# Altium PCB кошколаз.PcbDoc
Units mm, origin at the board's own origin, x right, y up, seen from the top; angles counter-clockwise.
Board outline 45 x 65 mm, 2 copper layers (Top Layer, Bottom Layer); 42 components, 44 nets, 170 pads, 24 vias.
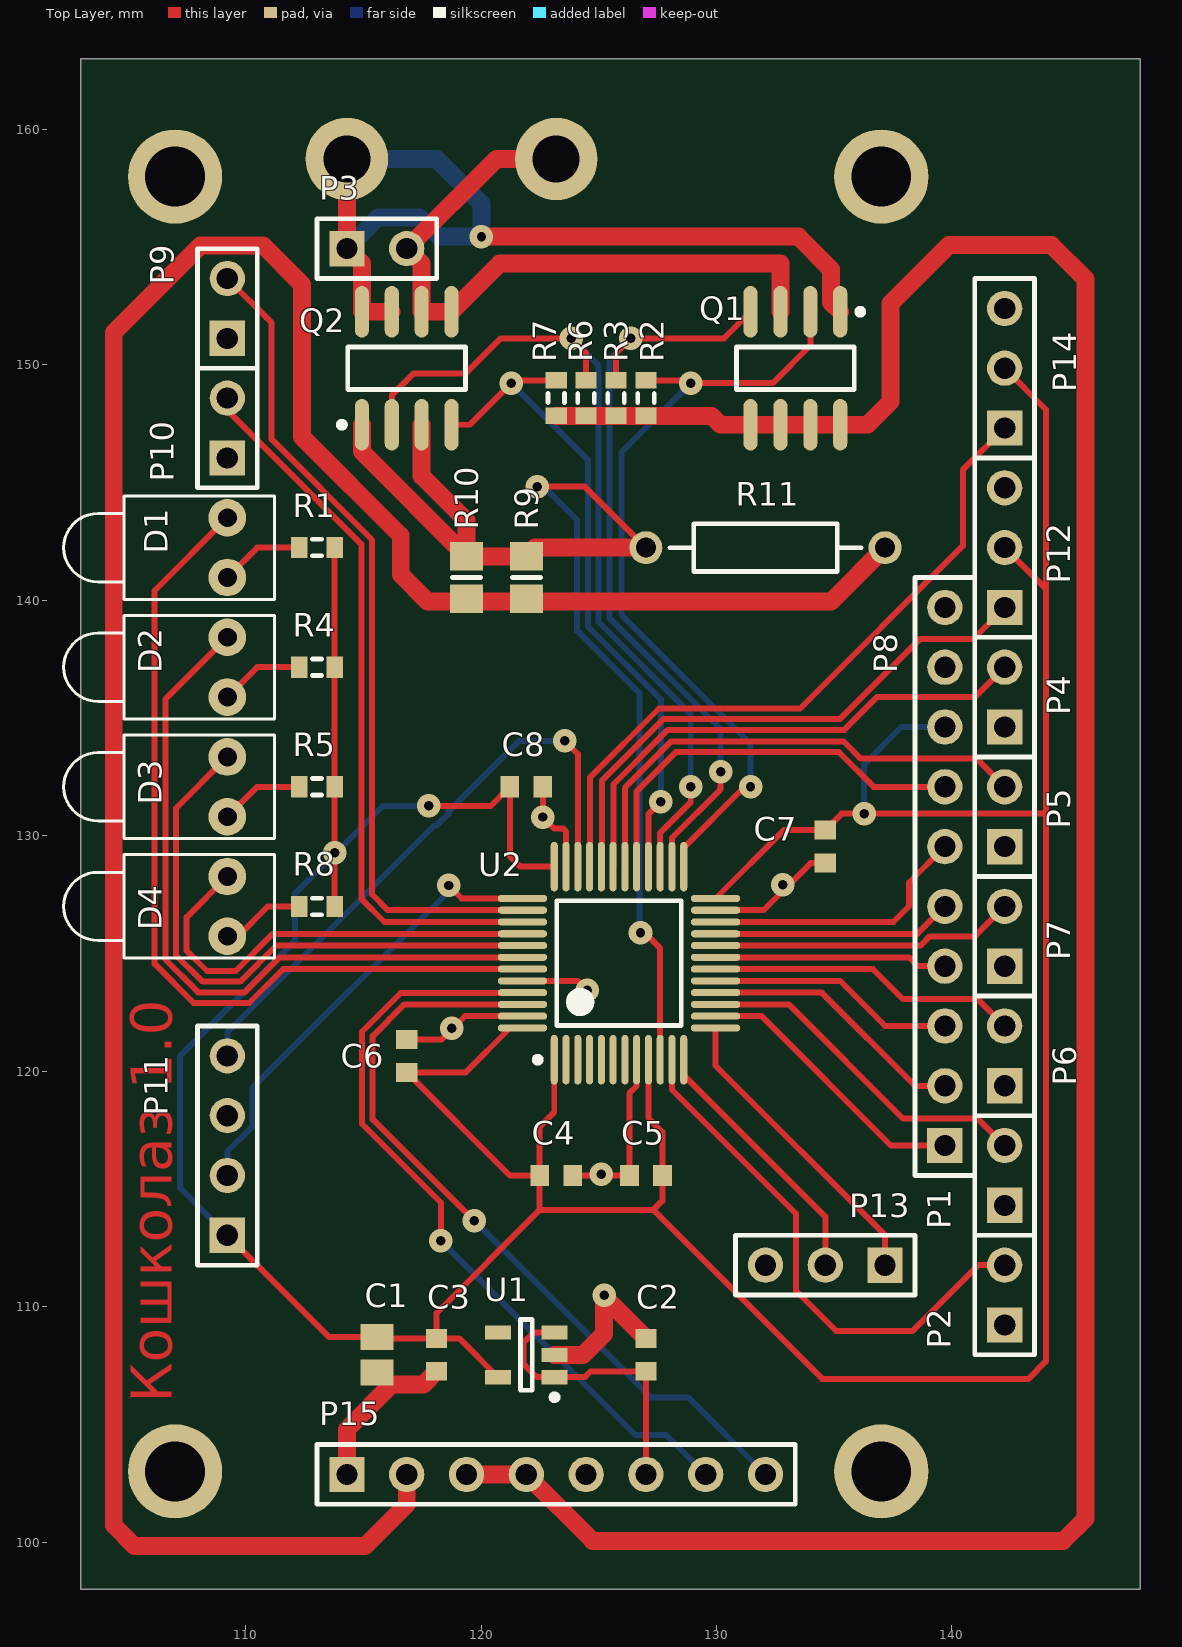
[diagram p0: Top Layer view]
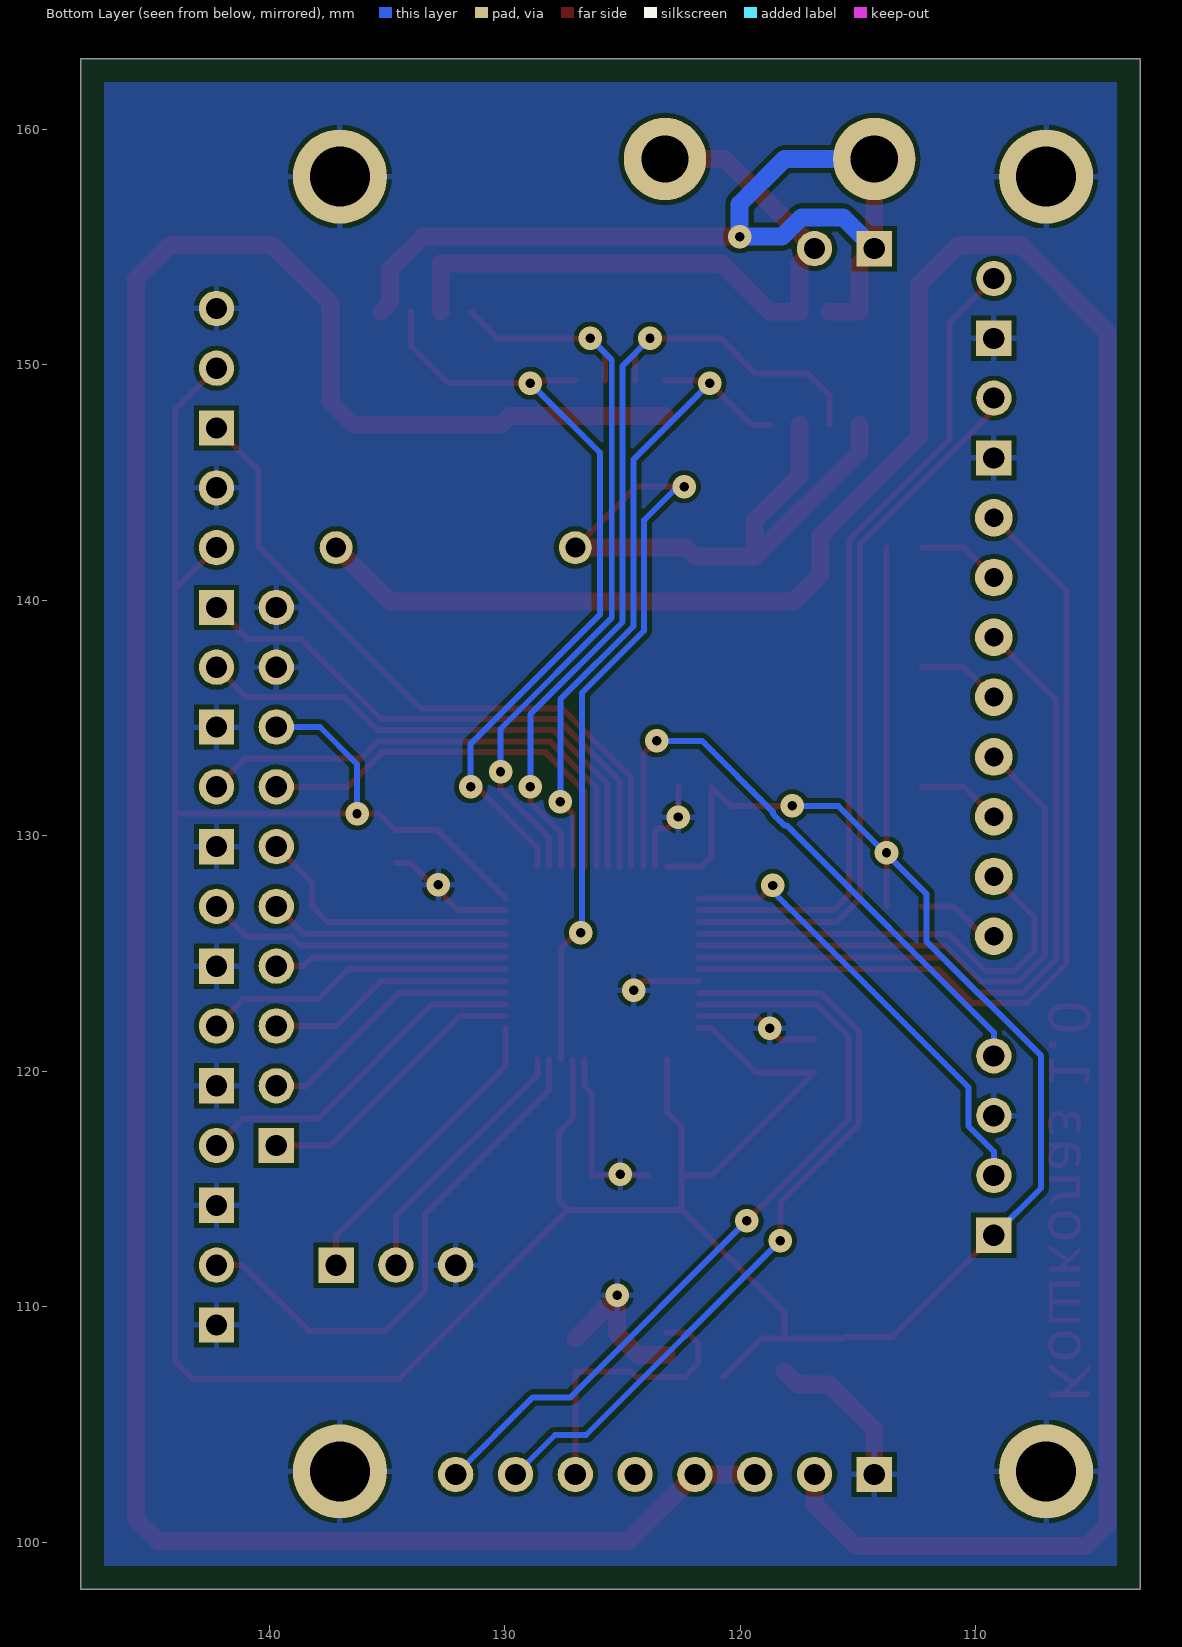
[diagram p1: Bottom Layer view, seen from below]

## Layer stack, top to bottom
Top Layer: signal copper 0.0356
Dielectric: dielectric 0.32, FR-4, Dk 4.8
Bottom Layer: signal copper 0.0356

## Board outline
103,98 148,98 148,163 103,163

## Design rules (kind name [scope] priority, off if disabled: settings)
Clearance Clearance_1 [HasFootprint('LQFP48_M')] p1: gap=0.2
Clearance [All] p2: gap=0.2
ComponentClearance [All] p1 off: gap=0.254 collisioncheckmode=3 verticalgap=0.254 showdistances=FALSE
MinimumSolderMaskSliver [All] p1: minsoldermaskwidth=0.2
PolygonConnect [All] p1: connectstyle=Relief reliefconductorwidth=0.254 reliefentries=4 polygonreliefangle="90 Angle"
RoomDefinition кошколаз [InComponentClass('кошколаз')] p1: confinementstyle=ConfineIn formatcopy=TRUE lockcomponents=FALSE outline 100,99 148,99 148,162 100,162
RoutingVias [All] p1: holewidth=0.4 width=1 viastyle="Through Hole" minholewidth=0.4 minwidth=1 maxholewidth=0.4 maxwidth=1
SMDNeckDown [All] p1: percent=50.000
SilkscreenOverComponentPads [All] p1: minsilkscreentomaskgap=0.254
SolderMaskExpansion [All] p1: expansion=0.102
Width Width_1 [(InNet('+5 POW') OR InNet('NetP3_1') OR InNet('NetP3_2'))] p1: maxlimit=1.016 minlimit=0.254 preferedwidth=1.016
Width [All] p2: maxlimit=2 minlimit=0.254 preferedwidth=0.254
25 further rules are at their usual default settings.

## Components (designator, comment, footprint, x,y, rotation, side; value= is the part's Value field where it differs from the comment)
C1 "10uF" C0805 115.57,107.95 r270 top
C2 "1uF" 1608[0603] 127,107.95 r270 top
C3 "1uF" 1608[0603] 118.11,107.95 r90 top
C4 "0.1uF" 1608[0603] 123.19,115.57 r180 top
C5 "0.1uF" 1608[0603] 127,115.57 r0 top
C6 "0.1uF" 1608[0603] 116.84,120.65 r270 top
C7 "0.1uF" 1608[0603] 134.62,129.54 r90 top
C8 "0.1uF" 1608[0603] 121.92,132.08 r180 top
D1 "LED1" LED-1 109.22,142.24 r180 top
D2 "LED1" LED-1 109.22,137.16 r180 top
D3 "LED1" LED-1 109.22,132.08 r180 top
D4 "LED1" LED-1 109.22,127 r180 top
P1 "STOP_D1" HDR1X2 142.24,114.3 r90 top
P2 "STOP_D2" HDR1X2 142.24,109.22 r90 top
P3 "MOTOR" HDR1X2 114.3,154.94 r0 top
P4 "STOP_U1" HDR1X2 142.24,134.62 r90 top
P5 "STOP_U2" HDR1X2 142.24,129.54 r90 top
P6 "WARNING_D" HDR1X2 142.24,119.38 r90 top
P7 "WARNING_U" HDR1X2 142.24,124.46 r90 top
P8 "IO port" HDR1X10 139.7,116.84 r90 top
P9 "KEY_UP" HDR1X2 109.22,151.13 r90 top
P10 "KEY_DOWN" HDR1X2 109.22,146.05 r90 top
P11 "Programming" HDR1X4 109.22,113.03 r90 top
P12 "SENSOR_1" HDR1X3 142.24,139.7 r90 top
P13 "USART" HDR1X3 137.16,111.76 r180 top
P14 "SENSOR_2" HDR1X3 142.24,147.32 r90 top
P15 "POW" HDR1X8 114.3,102.87 r0 top
Q1 "IRF7314" SO-8_N 133.35,149.86 r270 top
Q2 "IRF7314" SO-8_N 116.84,149.86 r90 top
R1 "470" J1-0603 113.03,142.24 r0 top
R2 "1k" J1-0603 127,148.59 r270 top
R3 "1k" J1-0603 125.73,148.59 r270 top
R4 "470" J1-0603 113.03,137.16 r0 top
R5 "470" J1-0603 113.03,132.08 r0 top
R6 "1k" J1-0603 124.46,148.59 r270 top
R7 "1k" J1-0603 123.19,148.59 r270 top
R8 "470" J1-0603 113.03,127 r0 top
R9 "1" 6-0805_N 121.92,140.97 r90 top
R10 "1" 6-0805_N 119.38,140.97 r90 top
R11 "1" AXIAL-0.4 132.08,142.24 r180 top
U1 "AAT3221" SOT23-5 121.92,107.95 r180 top
U2 "STM32F101C8T6" LQFP48_M 125.857,124.587 r90 top

## Footprints (in the part's own frame and the unit in brackets; to place one, negate y for a bottom-side part, rotate by r counter-clockwise, add the part's x,y. Pads: shape width x height; smd on the part's side, far side on the other; paste and mask are expansions set on the pad)
6-0805_N [mm] "Chip Resistor, Body 2.0x1.2mm, IPC Medium Density"
  rect 1.2x1.4 smd: 1(-0.9,0) 2(0.9,0)
  silkscreen extent 0,-0.6 0,0.6, body extent -1.07,-0.7 1.07,0.7, height 0.7
1608[0603] [mm] "Chip Capacitor, Body 1.6x0.8mm, IPC High Density"
  rect 0.8x0.9 smd: 1(-0.7,0) 2(0.7,0)
  body extent -0.87,-0.48 0.87,0.48, height 1.3
AXIAL-0.4 [mm] "Axial Device, Thru-Hole; 2 Leads; 0.4 in Pin Spacing"
  round 1.4 hole 0.85: 1(-5.08,0) 2(5.08,0)
  silkscreen extent -4.06,-1.02 4.06,1.02
C0805 [mm] "Chip Capacitor, Body 2.0x1.3mm, IPC High Density"
  rect 1.1x1.4 smd: 1(-0.75,0) 2(0.75,0)
  body extent -1.1,-0.72 1.1,0.72, height 1.4
HDR1X2 [mm] "Connector; Header; 2 Position"
  rect 1.5x1.5 hole 0.9: 1(0,0)
  round 1.5 hole 0.9: 2(2.54,0)
  silkscreen extent -1.27,-1.27 3.81,1.27
HDR1X3 [mm] "Connector; Header; 3 Position"
  rect 1.5x1.5 hole 0.9: 1(0,0)
  round 1.5 hole 0.9: 2(2.54,0) 3(5.08,0)
  silkscreen extent -1.27,-1.27 6.35,1.27
HDR1X4 [mm] "Connector; Header; 4 Position"
  rect 1.5x1.5 hole 0.9: 1(0,0)
  round 1.5 hole 0.9: 2(2.54,0) 3(5.08,0) 4(7.62,0)
  silkscreen extent -1.27,-1.27 8.89,1.27
HDR1X8 [mm] "Connector; Header; 8 Position"
  rect 1.5x1.5 hole 0.9: 1(0,0)
  round 1.5 hole 0.9: 2(2.54,0) 3(5.08,0) 4(7.62,0) 5(10.16,0) 6(12.7,0) 7(15.24,0) 8(17.78,0)
  silkscreen extent -1.27,-1.27 19.05,1.27
HDR1X10 [mm] "Connector; Header; 10 Position"
  rect 1.5x1.5 hole 0.9: 1(0,0)
  round 1.5 hole 0.9: 2(2.54,0) 3(5.08,0) 4(7.62,0) 5(10.16,0) 6(12.7,0) 7(15.24,0) 8(17.78,0) 9(20.32,0) 10(22.86,0)
  silkscreen extent -1.27,-1.27 24.13,1.27
J1-0603 [mm] "Chip Resistor, Body 1.6x0.8mm, IPC High Density"
  rect 0.7x0.9 smd: 1(-0.75,0) 2(0.75,0)
  silkscreen extent -0.2,-0.35 0.2,0.35, body extent -0.85,-0.48 0.85,0.48, height 0.9
LED-1 [mm] "LED; 2 Leads"
  round 1.6 hole 0.8: 1(0,1.27) 2(0,-1.27)
  silkscreen extent -2,-2.2 6.95,2.2
LQFP48_M [mm] "Thin QFP, 48-Leads, Body 7x7mm, Pitch 0.5mm, IPC Low Density"
  oval 2.1x0.3 smd: 1(-4.1,2.75) 2(-4.1,2.25) 3(-4.1,1.75) 4(-4.1,1.25) 5(-4.1,0.75) 6(-4.1,0.25) 7(-4.1,-0.25) 8(-4.1,-0.75) 9(-4.1,-1.25) 10(-4.1,-1.75) 11(-4.1,-2.25) 12(-4.1,-2.75) 25(4.1,-2.75) 26(4.1,-2.25) 27(4.1,-1.75) 28(4.1,-1.25) 29(4.1,-0.75) 30(4.1,-0.25) 31(4.1,0.25) 32(4.1,0.75) 33(4.1,1.25) 34(4.1,1.75) 35(4.1,2.25) 36(4.1,2.75)
  oval 0.3x2.1 smd: 13(-2.75,-4.1) 14(-2.25,-4.1) 15(-1.75,-4.1) 16(-1.25,-4.1) 17(-0.75,-4.1) 18(-0.25,-4.1) 19(0.25,-4.1) 20(0.75,-4.1) 21(1.25,-4.1) 22(1.75,-4.1) 23(2.25,-4.1) 24(2.75,-4.1) 37(2.75,4.1) 38(2.25,4.1) 39(1.75,4.1) 40(1.25,4.1) 41(0.75,4.1) 42(0.25,4.1) 43(-0.25,4.1) 44(-0.75,4.1) 45(-1.25,4.1) 46(-1.75,4.1) 47(-2.25,4.1) 48(-2.75,4.1)
  silkscreen extent -4.22,-2.65 2.65,3.57, body extent -3.5,-3.5 3.5,3.5, height 1.6
SO-8_N [mm] "SOIC, 8-Leads, Body 4.9x3.9mm, Pitch 1.27mm, IPC Medium Density"
  oval 2.2x0.6 smd: 1(-2.4,1.905) 2(-2.4,0.635) 3(-2.4,-0.635) 4(-2.4,-1.905) 5(2.4,-1.905) 6(2.4,-0.635) 7(2.4,0.635) 8(2.4,1.905)
  silkscreen extent -2.52,-2.5 0.9,2.88, body extent -2,-2.5 2,2.5, height 1.75
SOT23-5 [mm] "SOT23, 5-Leads, Body 3,0x3,0mm (max), Pitch 0,95mm, IPC Medium Density"
  rect 1.1x0.6 smd: 1(-1.2,0.95) 2(-1.2,0) 3(-1.2,-0.95) 4(1.2,-0.95) 5(1.2,0.95)
  silkscreen extent -1.33,-1.5 0.25,1.92, body extent -0.85,-1.5 0.85,1.5, height 1.45

## Part data
C1: library part "Cap Pol3", "Polarized Capacitor (Surface Mount)"
C2 C3 C4 C5 C6 C7 C8: library part "Cap Semi", "Capacitor (Semiconductor SIM Model)"
D1 D2 D3 D4: "Typical RED GaAs LED"
P1 P2 P3 P4 P5 P6 P7 P9 P10: library part "Header 2", "Header, 2-Pin"
P8: library part "Header 10", "Header, 10-Pin"
P11: library part "Header 4", "Header, 4-Pin"
P12 P13 P14: library part "Header 3", "Header, 3-Pin"
P15: library part "Header 8", "Header, 8-Pin"
Q1 Q2: "HEXFET Power MOSFET"
R1 R2 R3 R4 R5 R6 R7 R8 R9 R10: library part Res_SMD, "Resistor"
R11: library part Res2, "Resistor"
U1: "Low Dropout Linear Regulator"
U2: "STM32 ARM-based 32-bit MCU with 64 Kbytes Flash, 48-pin LQFP, Industrial Temperature"

## Free pads (board coordinates)
  round 4 hole 2.54: 3(107,103) 3(107,158) 3(137,103) 3(137,158)
  round 3.5 hole 2: 4(114.3,158.75) 4(123.19,158.75)

## Via types
v1: diameter 1, hole 0.4, Top Layer to Bottom Layer, 24 vias

## Nets (pads, with @x,y where several pads share a name; then routed paths per layer and width w, separated by ;. In a path a pad name is that pad's centre, name@x,y a point inside that pad or via, vN(x,y) a via of type N, cw(c..) or ccw(c..) an arc to the next point about the centre after c; other vN are vias at no path point)
+3.3: C1.1 C3.2 C4.2 C5.2 C6.2 C7.2 C8.2 P8.8 P11.1 P12.2 P14.2 R1.2 R4.2 R5.2 R8.2 U1.5 U2.1 U2.9 U2.24 U2.36 U2.48 | length 188.7
  Top Layer w0.254: P11.1@108.966,113.284 P11.1 113.55,108.7 C1.1 115.62,108.65 C3.2 ; R8.2 R5.2 R4.2 R1.2 ; v1(117.78,131.267) 120.407,131.267 C8.2 121.22,129.122 121.655,128.687 U2.36 ; U1.5 119.07,108.65 C3.2 ; U2.48 121.227,121.837 119.34,119.95 C6.2 121.22,115.57 C4.2 ; U2.1 123.107,118.256 122.49,117.639 C4.2 ; U2.9 127.107,118.003 127.7,117.41 C5.2 127.7,114.492 127.316,114.108 ; U2.24 132.86,130.24 C7.2 135.317,130.937 v1(136.271,130.937) 143.993,130.937 ; P12.2 143.993,140.487 ; P14.2 143.993,148.107 143.993,140.487 ; C3.2 118.11,109.728 122.49,114.108 ; 122.49,114.108 C4.2 ; 122.49,114.108 127.316,114.108 ; 127.316,114.108 134.49,106.934 143.256,106.934 143.993,107.671 143.993,130.937 ; 143.993,130.937 143.993,140.487
  Bottom Layer w0.254: P11.1 107.213,115.037 107.213,120.65 112.09,125.527 112.09,127.533 115.824,131.267 v1(117.78,131.267) ; v1(136.271,130.937) 136.271,133.045 137.846,134.62 P8.8
  other v1: 113.78,129.286
"+5 POW": P15.3 P15.4 Q1.5 Q1.6 Q1.7 Q1.8 R2.2 R3.2 R6.2 R7.2 | length 109.3
  Top Layer w0.762: P15.3 P15.4 124.739,100.051 144.729,100.051 145.669,100.99 145.669,153.645 144.221,155.092 139.878,155.092 137.389,152.603 137.389,148.438 136.411,147.46 Q1.8 Q1.7 Q1.6 Q1.5 130.162,147.46 129.782,147.84 R2.2 R3.2 R6.2 R7.2
"+5 STANBY": C2.2 P15.6 U1.1 U1.3 | length 12.3
  Top Layer w0.254: U1.3 122.235,108.9 121.793,108.458 121.793,107.569 122.362,107 U1.1 124.399,107 124.649,107.25 C2.2 P15.6
"+12 POW": P15.5
GND: C1.2 C2.1 C3.1 C4.1 C5.1 C6.1 C7.1 C8.1 P1.1 P2.1 P4.1 P5.1 P6.1 P7.1 P8.9 P8.10 P9.1 P10.1 P11.3 P12.3 P13.3 P14.3 P15.1 pad.3 U1.2 U2.8 U2.23 U2.35 U2.44 U2.47 | length 38.6
  Top Layer w0.254: C6.1 118.327,121.35 119.314,122.337 U2.47 ; U2.44 124.118,123.837 v1(124.511,123.444) ; C8.1 v1(122.62,130.796) 123.114,130.302 123.495,130.302 123.607,130.19 U2.35 ; C4.1 C5.1 126.3,119.061 126.607,119.368 U2.8 ; U2.23 131.993,126.837 133.996,128.84 C7.1
  Top Layer w0.762: P15.1 114.3,104.79 116.198,106.687 117.547,106.687 C3.1 ; U1.2 124.333,107.95 125.222,108.839 v1@125.222,110.428 ; v1(125.222,110.49) v1@125.222,110.428 ; C2.1 v1@125.222,110.428
  other v1: 125.095,115.621 118.745,121.818 132.817,127.914
KEY_DOWN: P10.2 U2.39 | length 30.9
  Top Layer w0.254: P10.2 109.22,148.075 114.91,142.385 114.91,127.323 115.896,126.337 U2.39
KEY_UP: P9.2 U2.38 | length 35.4
  Top Layer w0.254: P9.2 111.1,151.79 111.1,146.837 115.364,142.573 115.364,127.511 116.038,126.837 U2.38
LED1: D1.2 U2.43 | length 37.1
  Top Layer w0.254: D1.2 106.131,140.421 106.131,124.556 107.792,122.895 110.14,122.895 111.582,124.337 U2.43
LED2: D2.2 U2.42 | length 31.1
  Top Layer w0.254: D2.2 106.585,135.795 106.585,124.744 107.98,123.349 109.952,123.349 111.44,124.837 U2.42
LED3: D3.2 U2.41 | length 25.1
  Top Layer w0.254: D3.2 107.039,131.169 107.039,124.932 108.168,123.803 109.764,123.803 111.298,125.337 U2.41
LED4: D4.2 U2.40 | length 19.1
  Top Layer w0.254: D4.2 107.493,126.543 107.493,125.12 108.356,124.257 109.576,124.257 111.156,125.837 U2.40
"MOT A1": Q1.2 R2.1 U2.25 | length 34.5
  Top Layer w0.254: R2.1 128.79,149.34 v1(128.905,149.225) 132.385,149.225 133.985,150.825 Q1.2 ; U2.25 128.607,129.496 131.191,132.08 v1(131.445,132.08)
  Bottom Layer w0.254: v1(128.905,149.225) 125.959,146.279 125.959,139.395 131.445,133.909 v1(131.445,132.08)
"MOT A2": Q1.4 R3.1 U2.26 | length 33.2
  Top Layer w0.254: R3.1 125.73,150.495 v1(126.365,151.13) 130.315,151.13 Q1.4 ; U2.26 128.107,129.91 130.175,131.978 v1(130.175,132.715)
  Bottom Layer w0.254: v1(126.365,151.13) 125.451,150.216 125.451,139.261 130.175,134.537 v1(130.175,132.715)
"MOT B1": Q2.2 R6.1 U2.27 | length 37
  Top Layer w0.254: Q2.2 116.205,148.717 117.119,149.631 119.329,149.631 120.828,151.13 v1(123.825,151.13) 124.46,150.495 R6.1 ; U2.27 127.607,130.122 128.905,131.42 v1(128.905,132.08)
  Bottom Layer w0.254: v1(123.825,151.13) 124.99,149.965 124.99,139.079 128.905,135.165 v1(128.905,132.08)
"MOT B2": Q2.4 R7.1 U2.28 | length 28.6
  Top Layer w0.254: Q2.4 119.52,147.46 v1(121.285,149.225) 121.4,149.34 R7.1 ; U2.28 127.107,130.917 v1(127.635,131.445)
  Bottom Layer w0.254: v1(121.285,149.225) 124.536,145.974 124.536,138.891 127.635,135.793 v1(127.635,131.445)
"MOT CURENT SENS": Q2.1 Q2.3 R9.2 R10.2 R11.2 U2.10 | length 54.3
  Top Layer w0.254: v1(122.377,144.831) 124.409,144.831 R11.2 ; v1@126.721,126.111 127.607,125.225 U2.10
  Top Layer w0.762: Q2.1 114.935,146.315 R10.2 ; Q2.3 117.475,145.288 119.38,143.383 R10.2 ; R11.2 122.29,142.24 R9.2 R10.2
  Bottom Layer w0.254: v1@122.403,145.085 124.082,143.405 124.082,138.703 126.721,136.065 126.721,125.933 v1(126.771,125.882)
NetD1_1: D1.1 R1.1 | length 3.6
  Top Layer w0.254: D1.1 110.49,142.24 R1.1
NetD2_1: D2.1 R4.1 | length 3.6
  Top Layer w0.254: D2.1 110.49,137.16 R4.1
NetD3_1: D3.1 R5.1 | length 3.6
  Top Layer w0.254: D3.1 110.49,132.08 R5.1
NetD4_1: D4.1 R8.1 | length 3.6
  Top Layer w0.254: D4.1 109.677,125.73 110.947,127 R8.1
NetP3_1: P3.1 pad.4@114.3,158.75 Q1.1 Q2.7 Q2.8 | length 39.9
  Top Layer w0.762: pad.4@114.3,158.75 P3.1 114.935,154.305 Q2.8 Q2.7 ; v1(120.015,155.448) 133.477,155.448 134.866,154.059 134.866,152.649 Q1.1
  Bottom Layer w0.762: P3.1 115.631,156.271 117.391,156.271 118.214,155.448 v1(120.015,155.448) 120.015,156.845 118.11,158.75 pad.4@114.3,158.75
NetP3_2: P3.2 pad.4@123.19,158.75 Q1.3 Q2.5 Q2.6 | length 29
  Top Layer w0.762: pad.4@123.19,158.75 120.65,158.75 P3.2 117.475,154.305 Q2.6 Q2.5 120.79,154.305 132.715,154.305 Q1.3
PORT0: P8.1 U2.14 | length 12
  Top Layer w0.254: U2.14 131.917,122.337 137.414,116.84 P8.1
PORT1: P8.2 U2.16 | length 11.4
  Top Layer w0.254: U2.16 134.473,123.337 138.43,119.38 P8.2
PORT2: P8.3 U2.17 | length 10.5
  Top Layer w0.254: U2.17 135.243,123.837 137.16,121.92 P8.3
PORT3: P8.4 U2.19 | length 9.9
  Top Layer w0.254: U2.19 138.18,124.837 138.557,124.46 P8.4
PORT4: P8.5 U2.21 | length 10.2
  Top Layer w0.254: U2.21 138.53,125.837 139.693,127 P8.5
PORT5: P8.6 U2.22 | length 11.7
  Top Layer w0.254: U2.22 137.513,126.337 138.176,127 138.176,128.016 P8.6
PORT6: P8.7 U2.29 | length 17.6
  Top Layer w0.254: U2.29 126.607,131.89 128.27,133.553 135.204,133.553 136.677,132.08 P8.7
POW_GND: P15.2 R9.1 R10.1 R11.1 | length 111.8
  Top Layer w0.762: P15.2 116.84,101.6 115.062,99.822 105.283,99.822 104.394,100.711 104.394,151.384 108.077,155.067 110.744,155.067 112.395,153.416 112.395,146.939 116.586,142.748 116.586,141.097 117.729,139.954 134.874,139.954 R11.1
POW_OK: P15.8 U2.46 | length 33.4
  Top Layer w0.254: v1(119.71,113.64) 115.392,117.958 115.392,121.488 116.741,122.837 U2.46
  Bottom Layer w0.254: v1(119.71,113.64) 127.203,106.147 128.803,106.147 P15.8
POW_ON: P15.7 U2.45 | length 33.1
  Top Layer w0.254: v1(118.288,112.801) 118.288,114.42 114.938,117.77 114.938,121.676 116.576,123.314 U2.45@121.734,123.314
  Bottom Layer w0.254: v1(118.288,112.801) 126.543,104.546 127.864,104.546 P15.7
RX: P13.1 U2.13 | length 13.1
  Top Layer w0.254: U2.13 129.957,120.233 137.16,113.03 P13.1
SENS_1: P12.1 U2.32 | length 23.8
  Top Layer w0.254: U2.32 125.13,128.71 125.13,132.339 127.744,134.953 135.233,134.953 138.633,138.354 140.894,138.354 P12.1
SENS_2: P14.1 U2.33 | length 29.4
  Top Layer w0.254: U2.33 124.63,128.71 124.63,132.481 127.556,135.407 133.553,135.407 140.462,142.316 140.462,145.542 P14.1
STOP_D1: P1.2 U2.15 | length 14.8
  Top Layer w0.254: U2.15 133.068,122.837 137.922,117.983 141.097,117.983 P1.2
STOP_D2: P2.2 U2.11 | length 22.7
  Top Layer w0.254: U2.11 128.107,119.213 133.375,113.944 133.375,110.668 135.077,108.966 138.328,108.966 141.122,111.76 P2.2
STOP_U1: P4.2 U2.31 | length 22.2
  Top Layer w0.254: U2.31 125.63,128.71 125.63,132.197 127.932,134.499 135.421,134.499 136.811,135.89 140.97,135.89 P4.2
STOP_U2: P5.2 U2.30 | length 21.1
  Top Layer w0.254: U2.30 126.107,132.032 128.082,134.007 135.392,134.007 136.126,133.274 141.046,133.274 P5.2
SWCLK: P11.2 U2.37 | length 19.6
  Top Layer w0.254: v1(118.618,127.889) 119.17,127.337 U2.37
  Bottom Layer w0.254: P11.2 109.22,116.587 110.297,117.664 110.297,119.314 118.618,127.635 v1(118.618,127.889)
SWDO: P11.4 U2.34 | length 26.1
  Top Layer w0.254: v1(123.546,134.036) 124.107,133.474 U2.34
  Bottom Layer w0.254: P11.4 109.22,121.641 118.02,130.44 118.122,130.44 118.607,130.925 118.607,131.027 121.615,134.036 v1(123.546,134.036)
TX: P13.2 U2.12 | length 11.2
  Top Layer w0.254: U2.12 128.607,119.83 134.62,113.817 P13.2
WAR_D: P6.2 U2.18 | length 13.3
  Top Layer w0.254: U2.18 136.648,124.337 137.922,123.063 141.097,123.063 P6.2
WAR_U: P7.2 U2.20 | length 13
  Top Layer w0.254: U2.20 138.672,125.337 139.065,125.73 140.97,125.73 P7.2
pads on no net: U1.4 U2.2 U2.3 U2.4 U2.5 U2.6 U2.7

## Polygon pours and split planes (outlines as drawn)
GND on Bottom Layer "Bottom Layer-No Net" (solid, pour order 4): 104,99 147,99 147,162 104,162

## Other copper
Top Layer:
  text "Кошколаз 1.0" at 107.442,105.918 h3 r90

## Silkscreen, mask and mechanical layers (free items; w line width, h text height)
Top Solder:
  rectangle: 119.761,102.108 121.666,103.505
  rectangle: 114.681,102.108 116.586,103.505
Mechanical 1:
  the board outline again, w0.5
Mechanical 15:
  the board outline again, w1.2

## Dimensions
103,163 to 148,163 on Mechanical 2
103,163 to 148,98 on Mechanical 2